# EAGLE board UART-to-ESP32-WROOM_with_JTAG (EAGLE 9.6.2)
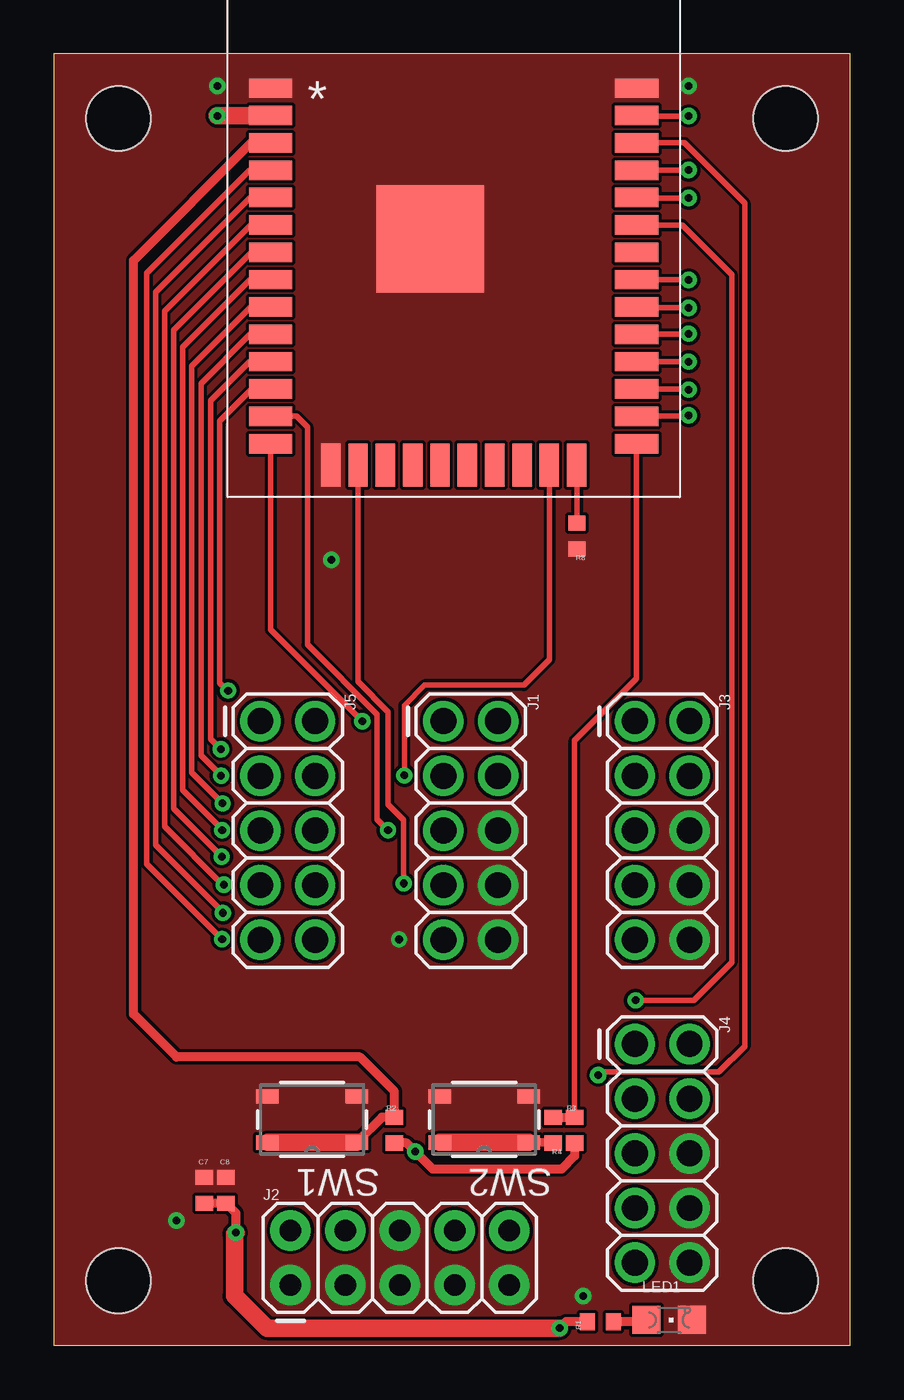
[diagram p0: board, top side]
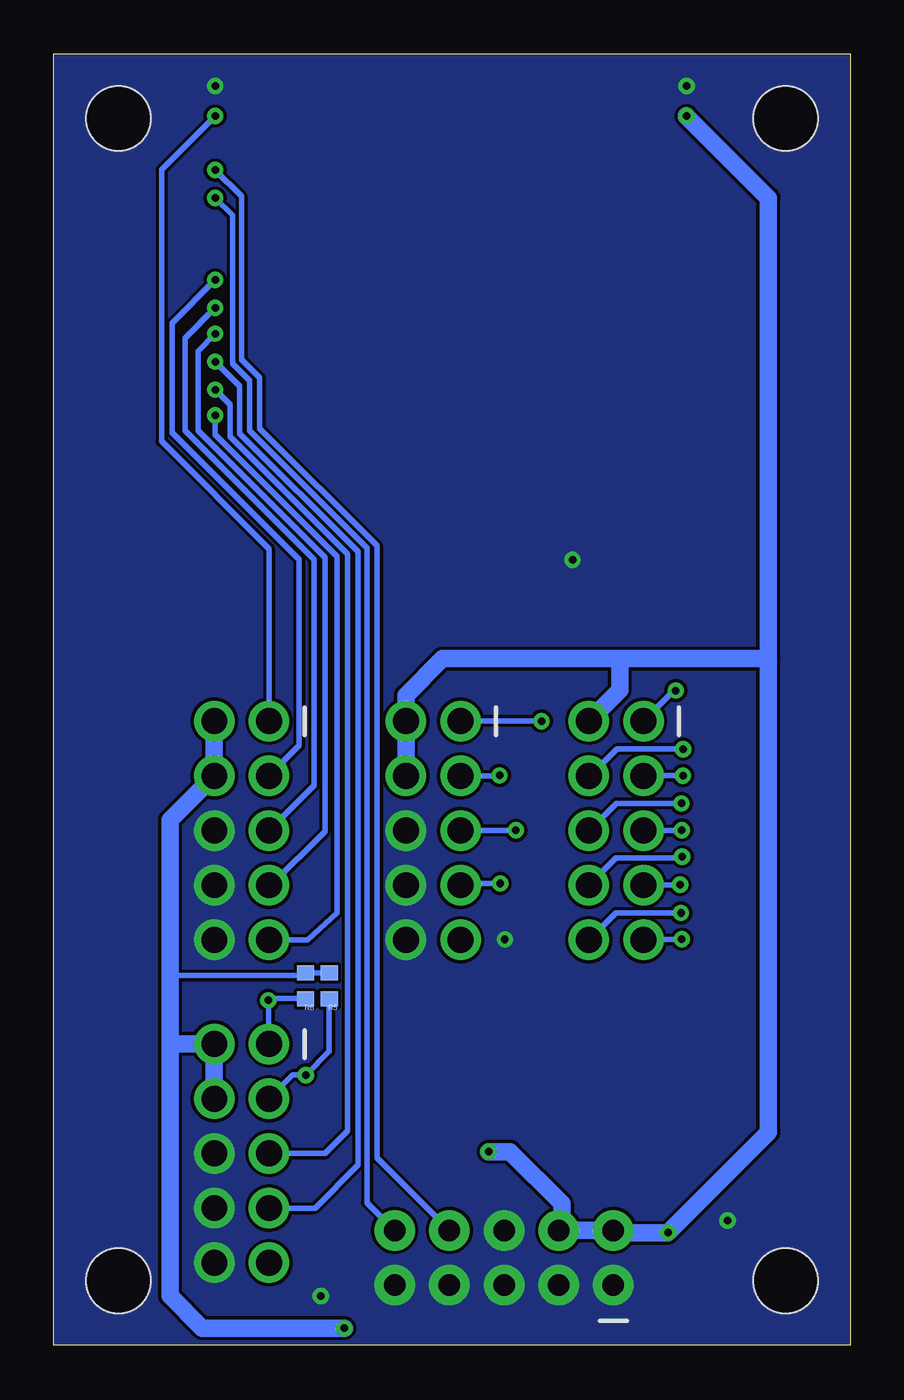
[diagram p1: board, bottom side, seen from below]

Size 37 x 60 mm. Coordinates in mm from the lower left corner, seen from the top.
Outline: 0,0 37,0 37,60 0,60 0,0
Copper layers (1*16): Top 0.035mm / dielectric 1.5mm / Bottom 0.035mm
Design rules "default *": minimum track width 6mil, minimum drill 0.35mm, track to track 6mil, track to pad 6mil, pad to pad 6mil, via to via 6mil, smd to smd 6mil, copper to edge 1mil, drill to drill 6mil, minimum pad ring 10mil, minimum via ring 8mil, stop-mask expansion 4mil, vias tented up to drill 0mil, thermal gap 10mil
Holes 3 mm at 34,3 3,3 34,57 3,57

## Footprints (pad centres in the part's own frame; a part is rotated, then mirrored left to right if it is on the bottom)
0402 = smd 0.8 x 0.7: P$1 0,0.6; P$2 0,-0.6
2X5 = drill 1.2 pad 1.88: 1 0,0; 2 0,2.54; 3 2.54,0; 4 2.54,2.54; 5 5.08,0; 6 5.08,2.54; 7 7.62,0; 8 7.62,2.54; 9 10.16,0; 10 10.16,2.54
2X5@1 = drill 1 pad 1.88: 1 0,0; 2 0,2.54; 3 2.54,0; 4 2.54,2.54; 5 5.08,0; 6 5.08,2.54; 7 7.62,0; 8 7.62,2.54; 9 10.16,0; 10 10.16,2.54
LED_0805_GREEN = smd 1.3 x 1.3: A 0,-1.05; C 0,1.05
PTS810 = smd 1.041 x 0.66: 1 -2.075,1.075; 2 2.075,1.075; 3 -2.075,-1.075; 4 2.075,-1.075
ESP32-WROOM-32D = smd 2 x 0.9: 1 0,0; 2 0,-1.27; 3 0,-2.54; 4 0,-3.81; 5 0,-5.08; 6 0,-6.35; 7 0,-7.62; 8 0,-8.89; 9 0,-10.16; 10 0,-11.43; 11 0,-12.7; 12 0,-13.97; 13 0,-15.24; 14 0,-16.51; 25 17,-16.51; 26 17,-15.24; 27 17,-13.97; 28 17,-12.7; 29 17,-11.43; 30 17,-10.16; 31 17,-8.89; 32 17,-7.62; 33 17,-6.35; 34 17,-5.08; 35 17,-3.81; 36 17,-2.54; 37 17,-1.27; 38 17,0 | smd 0.9 x 2: 15 2.785,-17.51; 16 4.055,-17.51; 17 5.325,-17.51; 18 6.595,-17.51; 19 7.865,-17.51; 20 9.135,-17.51; 21 10.405,-17.51; 22 11.675,-17.51; 23 12.945,-17.51; 24 14.215,-17.51 | smd 5 x 5: 39 7.415,-7

## Placement (x,y rotation side)
C7  0.1uF  [0402]  7,7.2 0 top
C8  10uF  [0402]  8,7.2 0 top
J1  [2X5]  18.1,29 270 top
J2  10-pos  [2X5@1]  11,2.8 0 top
J3  [2X5]  27,29 270 top
J4  [2X5]  27,14 270 top
J5  [2X5]  9.6,29 270 top
LED1  Green  [LED_0805_GREEN]  28.59,1.18 270 top
R1  470R0  [0402]  25.4,1.1 90 top
R2  10K0  [0402]  15.82,10 0 top
R3  10K0  [0402]  24.2,10 0 top
R4  2K2  [0402]  23.2,10 180 top
R5  10K0  [0402]  24.2,16.7 180 bottom
R6  10K0  [0402]  25.3,16.7 180 bottom
R8  1K0  [0402]  24.3,37.6 180 top
SW1  PTS810SJG250SMTRLFS  [PTS810]  12,10.5 180 top
SW2  PTS810SJG250SMTRLFS  [PTS810]  20,10.5 180 top
U2  [ESP32-WROOM-32D]  10.08,58.4 0 top

## Library data of the parts
C7 = 3D_MIG_Controller; PARTNO: CL05F104ZO5NNNC
C8 = 3D_MIG_Controller; PARTNO: CL05A106MP8NUB8
J1 J3-J5 = 3D_MIG_Controller; PROD_ID: CONN-08499; SF_ID: PRT-0778
J2 = 3D_MIG_Controller; PARTNO: PH2RA-10-UA
LED1 = 3D_MIG_Controller; PARTNO: LG R971-KN-1
R1 = 3D_MIG_Controller; PARTNO: RMCF0402JT470R
R2 R3 R5 R6 = 3D_MIG_Controller; PARTNO: RMCF0402JT10K0
R4 = 3D_MIG_Controller; PARTNO: RMCF0402JT2K20
R8 = 3D_MIG_Controller; PARTNO: CRG0402J1K0
SW1 SW2 = 3D_MIG_Controller; BUILT_BY: EMA_Cory; COPYRIGHT: Copyright (C) 2018 Accelerated Designs. All rights reserved; DATASHEET: https://www.ckswitches.com/products/tactile/PTS810/#PTS810SJG250SMTRLFS; MANUFACTURER_PART_NUMBER: PTS810SJG250SMTRLFS; VENDOR: C&K
U2 = 3D_MIG_Controller; PARTNO: ESP32-WROOM-32D

## Nets
CHIP_PU: R2.P$1 SW1.1 SW1.2 U2.3
GND: C7.P$1 C8.P$1 J1.6 J1.8 J1.10 J2.1 J2.3 J2.5 J2.6 J2.7 J2.9 J3.6 J3.8 J3.10 J4.6 J4.8 J4.10 LED1.C R8.P$1 SW1.3 SW1.4 SW2.3 SW2.4 U2.1 U2.15 U2.38 U2.39
I2C_SCL: J4.3 R5.P$1 U2.36
I2C_SDA: J4.1 R6.P$1 U2.33
IO25: J5.3 U2.10
IO26: J5.4 U2.11
IO27: J5.1 U2.12
IO32: J5.5 U2.8
IO33: J5.6 U2.9
IO34: J5.7 U2.6
IO35: J5.8 U2.7
N$1: LED1.A R1.P$2
N$3: R4.P$1 SW2.1 SW2.2
N$18: U2.17
N$19: U2.18
N$20: U2.19
N$21: U2.20
N$22: U2.21
N$23: U2.22
N$25: R8.P$2 U2.24
N$26: R3.P$1 R4.P$2 U2.25
NC: J4.9
RESET: J1.9
RX: J2.10 U2.34
RX2: J4.5 U2.27
SENSORVN: J5.10 U2.5
SENSORVP: J5.9 U2.4
SPI_CLK: J3.5 U2.30
SPI_CS0: J3.7 U2.29
SPI_CS1: J3.9 U2.26
SPI_MISO: J3.3 U2.31
SPI_MOSI: J3.1 U2.37
TCK: J1.7 U2.16
TDI: J1.1 U2.14
TDO: J1.3 U2.23
TMS: J1.5 U2.13
TX: J2.8 U2.35
TX2: J4.7 U2.28
VDD: C7.P$2 C8.P$2 J1.2 J1.4 J2.2 J2.4 J3.2 J3.4 J4.2 J4.4 J5.2 R1.P$1 R2.P$2 R3.P$2 R5.P$2 R6.P$2 U2.2

## Tracks (layer width: path | path; a pad name or v marks a point on that pad's centre or on a via)
CHIP_PU
  Top 0.406: SW1.1 15.25,10.6 R2.P$1 15.82,11.8 14.22,13.4 5.7,13.4 3.7,15.4 3.7,50.4 9.16,55.86 U2.3
  Top 0.813: SW1.2 SW1.1
GND  (via drill 0.35)
  other vias: 5.7,5.8 24.6,2.3 7.6,58.5 29.5,58.5 16.04,18.86 12.9,36.5
  pour Top (no thermals): 0,60 37,60 37,0 0,0
  pour Bottom (no thermals): 0,60 37,60 37,0 0,0
I2C_SCL  (via drill 0.35)
  Top 0.254: 27.12,55.9 U2.36 29.3,55.86 32.1,53.06 32.1,13.9 30.91,12.71 25.44,12.71 v25.29,12.56
  Bottom 0.254: J4.3 25.9,12.56 v25.29,12.56 24.2,13.65 R5.P$1
I2C_SDA  (via drill 0.35)
  Top 0.254: U2.33 29.2,52.05 31.5,49.75 31.5,17.8 29.73,16.03 v27.03,16.03
  Bottom 0.254: J4.1 27.03,14.08 v27.03,16.03 26.95,16.11 R6.P$1
IO25  (via drill 0.35)
  Top 0.254: v7.77,26.47 6.84,27.4 6.84,44.68 9.13,46.97 U2.10
  Bottom 0.254: J5.3 v7.77,26.47
IO26  (via drill 0.35)
  Top 0.254: U2.11 9.1,45.7 7.29,43.89 7.29,28.17 v7.76,27.7
  Bottom 0.254: J5.4 12.08,26.46 10.84,27.7 v7.76,27.7
IO27  (via drill 0.35)
  Top 0.254: U2.12 9.2,44.43 7.7,42.93 7.7,30.78 8.06,30.42 v8.1,30.42
  Bottom 0.254: J5.1 8.18,30.42 v8.1,30.42
IO32  (via drill 0.35)
  Top 0.254: v7.82,23.94 7.82,23.96 5.98,25.8 5.98,46.38 9.11,49.51 U2.8
  Bottom 0.254: J5.5 7.84,23.92 v7.82,23.94
IO33  (via drill 0.35)
  Top 0.254: v7.84,25.18 6.4,26.62 6.4,45.5 9.14,48.24 U2.9
  Top 0.813: U2.9 10.04,48.2
  Bottom 0.254: J5.6 12.12,23.92 10.86,25.18 v7.84,25.18
IO34  (via drill 0.35)
  Top 0.254: v7.9,21.4 7.85,21.4 5.15,24.1 5.15,48.05 9.15,52.05 U2.6
  Bottom 0.254: J5.7 7.92,21.38 v7.9,21.4
IO35  (via drill 0.35)
  Top 0.254: v7.8,22.7 v7.8,22.71 5.56,24.95 5.56,47.16 9.18,50.78 U2.7
  Bottom 0.254: J5.8 10.88,22.64 7.86,22.64 v7.8,22.7
N$1
  Top 0.406: LED1.A 27.46,1.1 R1.P$2
N$3
  Top 0.406: R4.P$1 22.9,9.4 SW2.1
  Top 0.813: SW2.2 SW2.1
N$25
  Top 0.254: U2.24 R8.P$2
N$26
  Top 0.254: U2.25 27.08,30.99 24.2,28.11 R3.P$1
  Top 0.406: R4.P$2 R3.P$1
RX  (via drill 0.35)
  Top 0.254: v29.5,53.3 27.1,53.3 U2.34
  Bottom 0.254: J2.10 22.45,6.63 22.45,37.03 27.91,42.49 27.91,44.81 28.7,45.6 28.7,52.5 v29.5,53.3
RX2  (via drill 0.35)
  Top 0.254: U2.27 29.57,44.43 v29.5,44.4
  Bottom 0.254: v29.5,44.4 28.8,43.7 28.8,42.21 23.34,36.75 23.34,9.97 24.39,8.92 J4.5
SENSORVN  (via drill 0.35)
  Top 0.254: v7.86,20.09 7.86,20.11 4.73,23.24 4.73,48.93 9.12,53.32 U2.5
  Bottom 0.254: J5.10 10.88,20.1 v7.87,20.1 v7.86,20.09
SENSORVP  (via drill 0.35)
  Top 0.254: U2.4 9.09,54.59 4.31,49.81 4.31,22.37 v7.81,18.87 v7.82,18.87
  Bottom 0.254: v7.82,18.87 9.6,18.87 J5.9
SPI_CLK  (via drill 0.35)
  Top 0.254: U2.30 27.12,48.2 v29.5,48.2
  Bottom 0.254: v29.5,48.2 30.9,46.8 30.9,42.5 24.9,36.5 24.9,26.02 J3.5
SPI_CS0  (via drill 0.35)
  Top 0.254: 27.11,47 U2.29 29.47,46.97 v29.5,47
  Bottom 0.254: v29.5,47 30.3,46.2 30.3,42.5 24.4,36.6 24.4,23.88 26.9,21.38 J3.7
SPI_CS1  (via drill 0.35)
  Top 0.254: U2.26 29.56,43.16 v29.5,43.2
  Bottom 0.254: v29.5,43.2 29.5,42.31 23.85,36.65 23.85,20.08 25.2,18.84 J3.9
SPI_MISO  (via drill 0.35)
  Top 0.254: U2.31 29.4,49.51 v29.5,49.5
  Bottom 0.254: J3.3 25.6,27.86 25.6,36.5 31.5,42.4 31.5,47.5 v29.5,49.5
SPI_MOSI  (via drill 0.35)
  Top 0.254: 27.04,57.09 U2.37 27.1,57.11 v29.5,57.11
  Bottom 0.254: v29.5,57.11 32,54.61 32,42 27,37 J3.1
TCK  (via drill 0.35)
  Top 0.254: U2.16 14.13,30.83 15.54,29.43 15.54,25.12 16.26,24.4 v16.26,21.46
  Bottom 0.254: J1.7 18.1,21.46 v16.26,21.46
TDI  (via drill 0.35)
  Top 0.254: U2.14 10.08,33.25 v14.33,29 v14.34,29
  Bottom 0.254: v14.34,29 J1.1
TDO  (via drill 0.35)
  Top 0.254: U2.23 23.02,31.86 21.84,30.67 17.23,30.67 16.29,29.73 v16.29,26.48
  Bottom 0.254: J1.3 16.32,26.45 v16.29,26.48
TMS  (via drill 0.35)
  Top 0.254: U2.13 11.28,43.16 11.78,42.66 11.78,32.55 15.03,29.3 15.03,24.43 v15.53,23.93
  Bottom 0.254: v15.53,23.93 J1.5
TX  (via drill 0.35)
  Top 0.254: U2.35 v29.5,54.59 v29.5,54.6
  Bottom 0.254: J2.8 21.99,8.71 21.99,37.15 27.44,42.6 27.44,44.96 28.28,45.8 28.28,53.38 v29.5,54.6
TX2  (via drill 0.35)
  Top 0.254: U2.28 v29.5,45.7
  Top 0.813: U2.28 27.1,45.72
  Bottom 0.254: v29.5,45.7 28.36,44.56 28.36,42.36 22.87,36.87 22.87,8.38 24.87,6.38 J4.7
VDD  (via drill 0.35)
  Top 0.406: R2.P$2 16.4,9.4 v16.8,9 17.6,8.2 23.6,8.2 24.2,8.8 R3.P$2 | R1.P$1 23.8,1.1 v23.5,0.8 | v8.46,5.24 8.46,6.14 C8.P$2 C7.P$2
  Top 0.813: v7.6,57.12 U2.2 | v8.46,5.24 8.4,5.18 8.4,2.3 9.9,0.8 v23.5,0.8
  Bottom 0.254: R5.P$2 R6.P$2 25.4,17.2 31.6,17.2
  Bottom 0.813: 3.8,31.9 3.8,53.3 7.6,57.1 v7.6,57.12 | 3.8,31.9 3.8,9.9 v8.46,5.24 10.9,5.24 J2.2 J2.4 13.4,5.48 13.4,6.6 15.8,9 v16.8,9 | v23.5,0.8 30.1,0.8 31.6,2.3 31.6,14 | 31.6,14 31.6,17.2 31.6,24.4 J3.4 J3.2 | 10.7,31.9 18.94,31.9 20.64,30.2 J1.2 J1.4 | 10.7,31.9 3.8,31.9 | J4.4 J4.2 31.6,14 | J5.2 10.7,30.44 10.7,31.9